# Altium PCB PDP_PCB.PcbDoc
Units mil, origin at the board's own origin, x right, y up, seen from the top; angles counter-clockwise.
Board outline 9130 x 8790 mil, 2 copper layers (Top Layer, Bottom Layer); 53 components, 56 nets, 343 pads, 0 vias.
Unrouted connection lines stored in the file: 164.
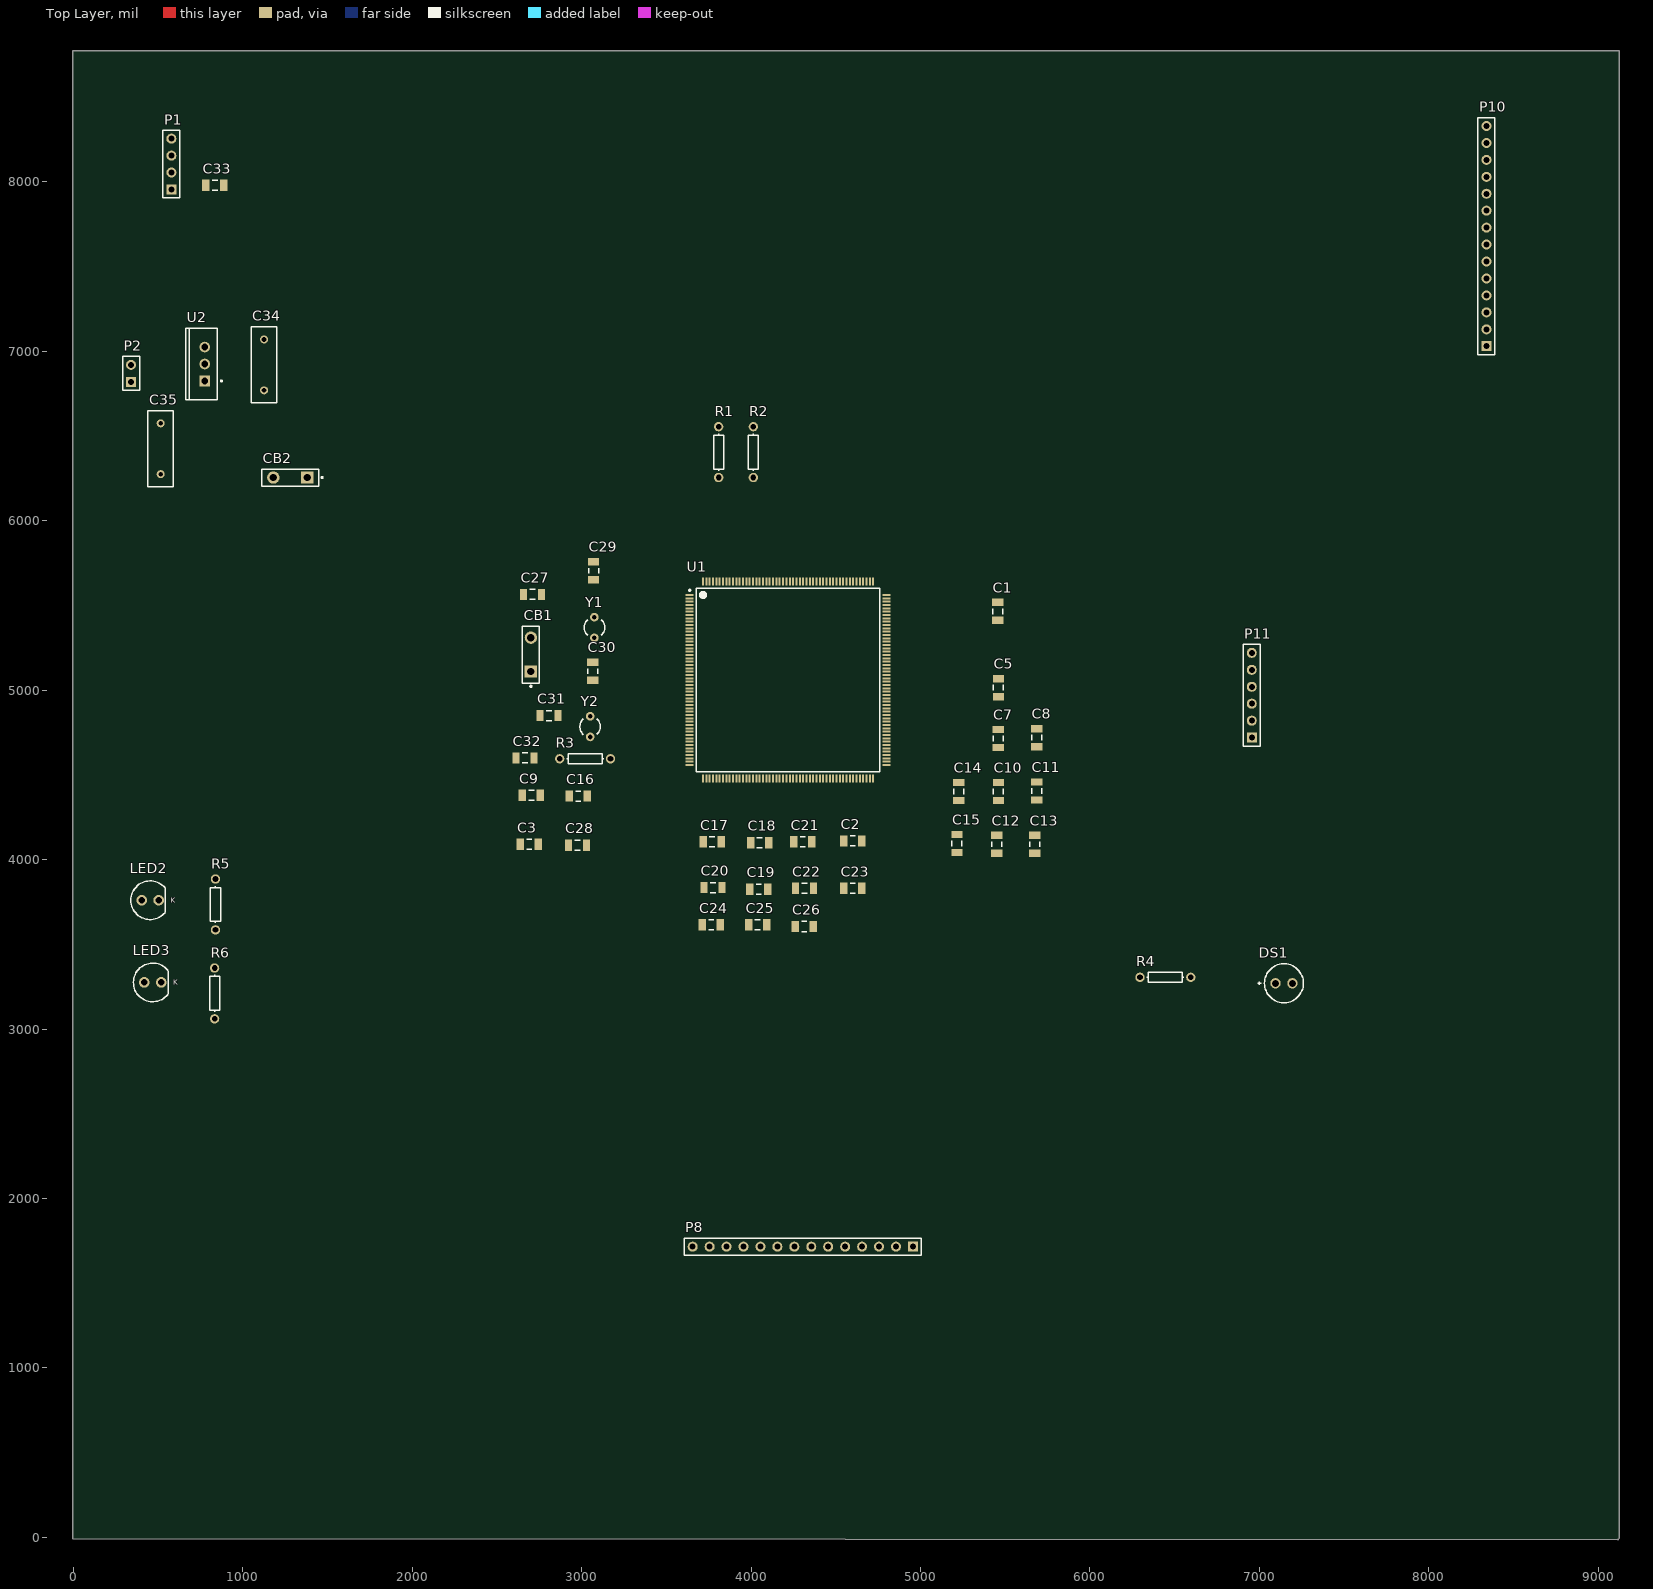
[diagram p0: Top Layer view]
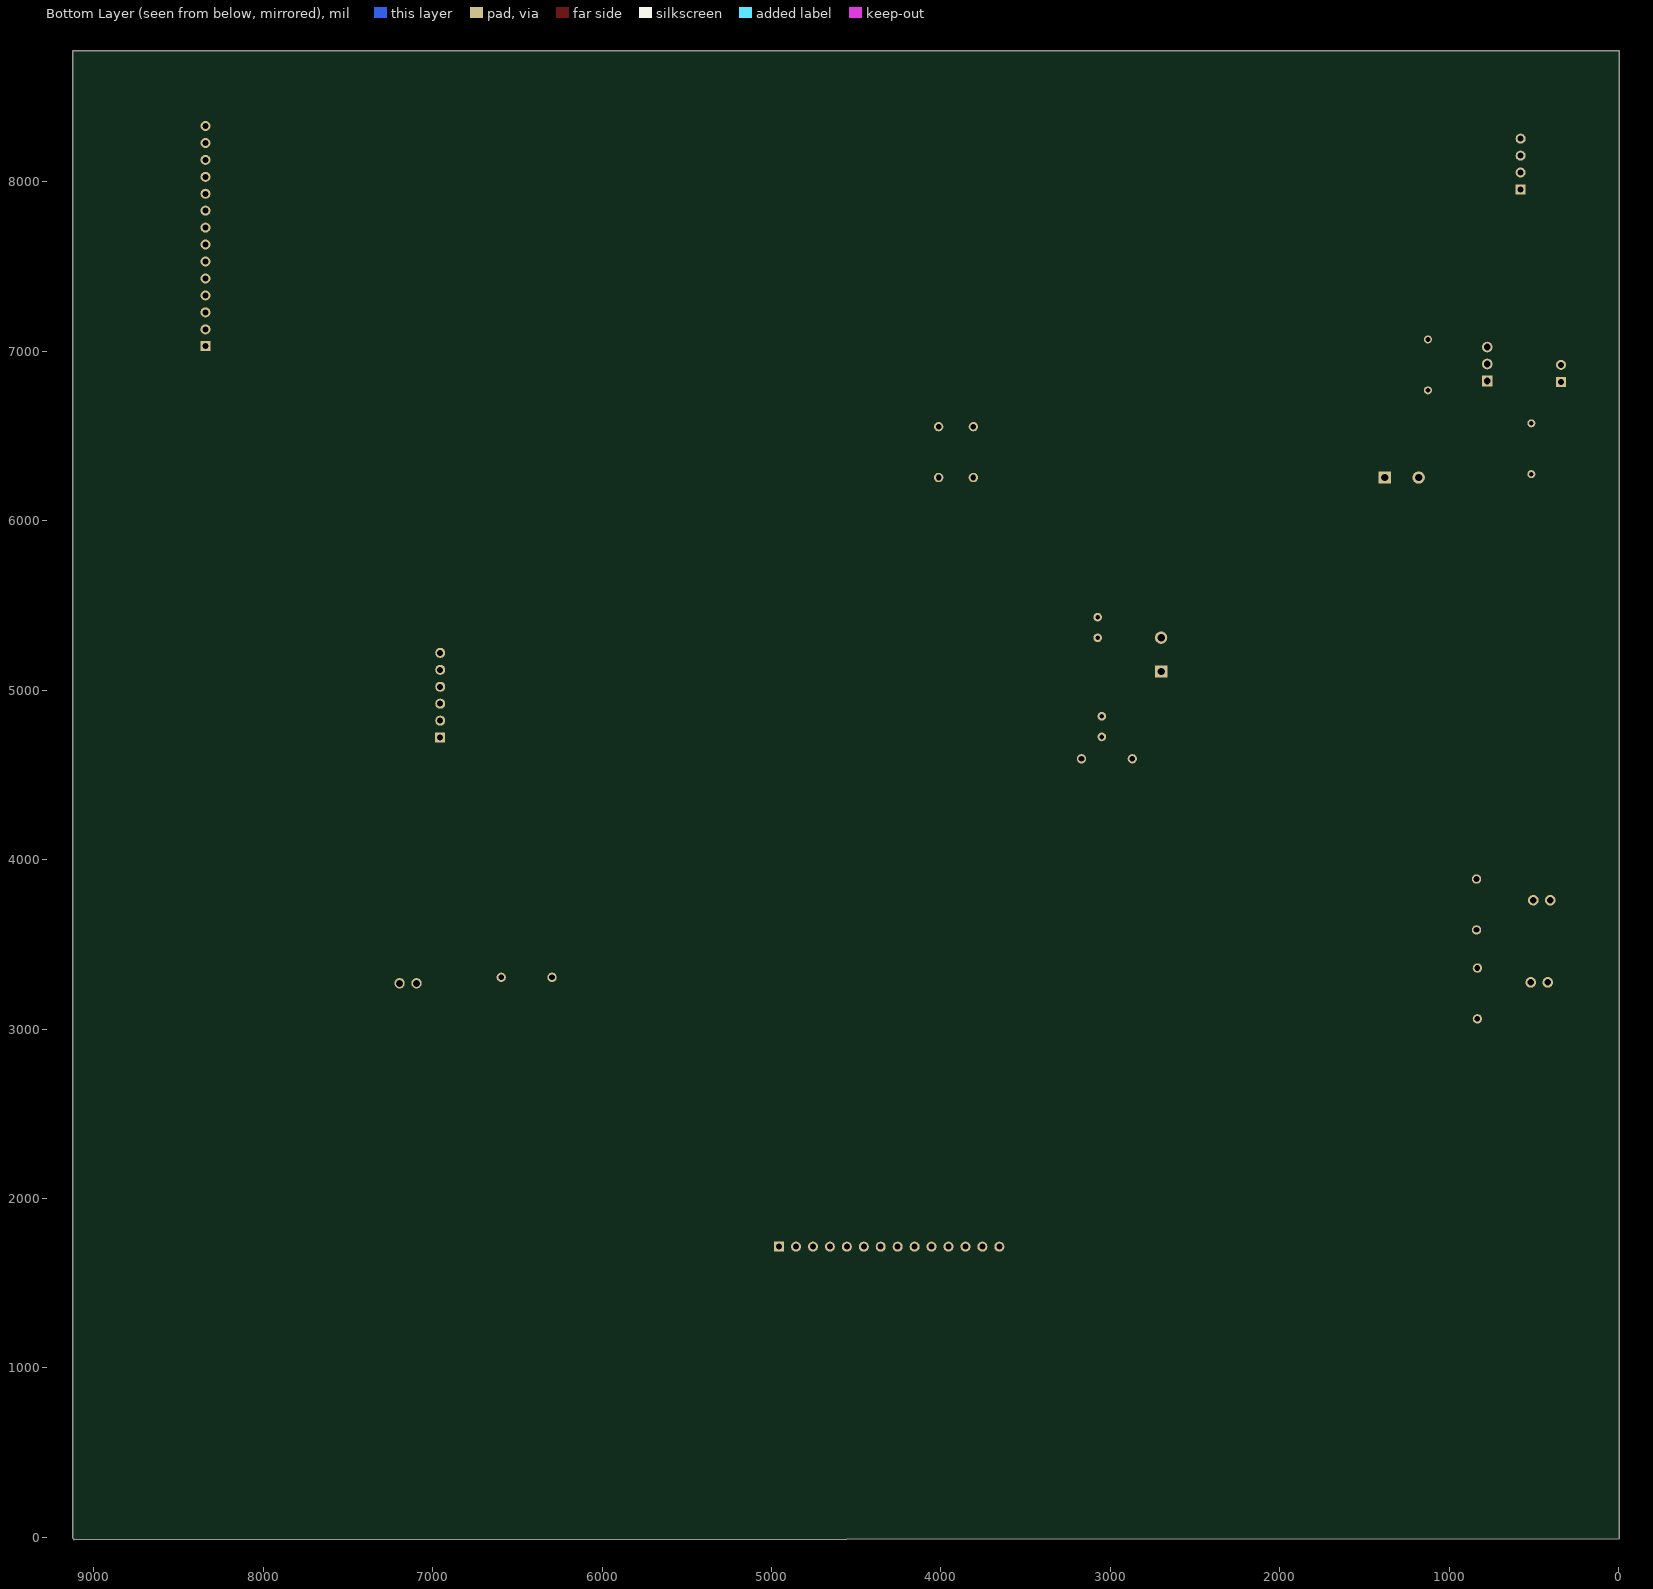
[diagram p1: Bottom Layer view, seen from below]

## Layer stack, top to bottom
Top Solder: solder mask 0.4, Solder Resist, Dk 3.5
Top Layer: signal copper 1.4
Dielectric 1: dielectric 12.6, FR-4, Dk 4.8
Bottom Layer: signal copper 1.4
Bottom Solder: solder mask 0.4, Solder Resist, Dk 3.5

## Board outline
-5,-10 -5,8775 9125,8775 9125,-5 9115,-15

## Design rules (kind name [scope] priority, off if disabled: settings)
Clearance [All] p1: gap=5 ignorepadtopadclearanceinfootprint=TRUE except(0: Arc-Hole Track-Hole SMDPad-Hole THPad-Hole Via-Hole Fill-Hole Poly-Hole Region-Hole Text-Hole)
PolygonConnect [All] p1: connectstyle=Relief reliefconductorwidth=10 reliefentries=4 polygonreliefangle="90 Angle" airgapwidth=10
RoutingVias [All] p1: holewidth=28 width=50 viastyle="Through Hole" minholewidth=28 minwidth=50 maxholewidth=28 maxwidth=50
SolderMaskExpansion [All] p1: expansion=4
Width [All] p1: maxlimit=10 minlimit=10 preferedwidth=10
30 further rules are at their usual default settings.

## Components (designator, comment, footprint, x,y, rotation, side; value= is the part's Value field where it differs from the comment)
C1 "VCAP2" C1206 5455,5465 r90 top value=2.2uF
C2 "VCAP1" C1206 4600,4110 r180 top value=2.2uF
C3 "NRST Cap" C1206 2690,4090 r0 top value=0.1uF
C5 "DSI_Filter2" C1206 5460,5015 r90 top value=2.2uF
C7 "DSI_Filter3" C1206 5458.15,4715 r90 top value=100nF
C8 "DSI_Filter3" C1206 5685,4720 r90 top value=100nF
C9 "DSI_Filter3" C1206 2703.15,4380 r180 top value=100nF
C10 "DSI_Filter3" C1206 5460,4401.85 r90 top value=100nF
C11 "DSI_Filter3" C1206 5685,4405 r90 top value=100nF
C12 "DSI_Filter3" C1206 5450,4090 r90 top value=100nF
C13 "DSI_Filter3" C1206 5675,4090 r90 top value=100nF
C14 "DSI_Filter3" C1206 5225,4401.85 r90 top value=100nF
C15 "DSI_Filter3" C1206 5215,4095 r90 top value=100nF
C16 "DSI_Filter3" C1206 2980,4375 r0 top value=100nF
C17 "DSI_Filter3" C1206 3770,4105 r0 top value=100nF
C18 "DSI_Filter3" C1206 4050,4100 r0 top value=100nF
C19 "DSI_Filter3" C1206 4045,3825 r0 top value=100nF
C20 "DSI_Filter3" C1206 3775,3835 r180 top value=100nF
C21 "DSI_Filter3" C1206 4305,4105 r0 top value=100nF
C22 "DSI_Filter3" C1206 4315,3830 r180 top value=100nF
C23 "DSI_Filter3" C1206 4600,3830 r180 top value=100nF
C24 "DSI_Filter3" C1206 3765,3615 r180 top value=100nF
C25 "DSI_Filter3" C1206 4038.15,3615 r180 top value=100nF
C26 "DSI_Filter3" C1206 4313.15,3605 r180 top value=100nF
C27 "DSI_Filter3" C1206 2710,5565 r180 top value=4.7uF
C28 "DSI_Filter3" C1206 2975,4085 r180 top value=1uF
C29 "DSI_Filter3" C1206 3070,5705 r90 top value=12.5pF
C30 "DSI_Filter3" C1206 3065,5111.85 r90 top value=12.5pF
C31 "DSI_Filter3" C1206 2806.85,4850 r0 top value=18pF
C32 "DSI_Filter3" C1206 2665,4600 r180 top value=18pF
C33 "DSI_Filter3" C1206 835,7980 r180 top value=100nF
C34 "Cap" RAD-0.3 1125,6920 r270 top value=0.47uF
C35 "Cap" RAD-0.3 515,6425 r90 top value=33uF
CB1 "Reset Button" SPST-2 2700,5210 r90 top
CB2 "REG_PWR" SPST-2 1280,6255 r180 top
DS1 "PWR_LED" AVAG-HLMP-4740 7145,3270 r0 top
LED2 "STATUS1" "Type 5mm" 453.15,3760 r0 top
LED3 "STATUS2" "Type 5mm" 468.15,3275 r0 top
P1 "Header 4" HDR1X4 578.15,7955 r90 top
P2 "Header 2" HDR1X2 340,6820 r90 top
P8 "Header 14" HDR1X14 4955,1715 r180 top
P10 "Header 14" HDR1X14 8340,7030 r90 top
P11 "Header 6" HDR1X6 6955,4720 r90 top
R1 "PDR_Pullup" AXIAL-0.3 3808.15,6405 r270 top value=10K
R2 "BOOT_Pulldown" AXIAL-0.3 4013.15,6405 r90 top value=10K
R3 "Inverter_Lim" AXIAL-0.3 3020,4595 r0 top value=100
R4 "Inverter_Lim" AXIAL-0.3 6445,3305 r0 top value=100
R5 "Inverter_Lim" AXIAL-0.3 838.15,3735 r90 top value=100
R6 "Inverter_Lim" AXIAL-0.3 833.15,3210 r90 top value=100
U1 "STM32F769BIT6" STM-LQFP208_V 4218.15,5060 r0 top
U2 "LM3940IT-3.3" NDE0003A 775,6925 r90 top
Y1 "XTAL 32.768 kHz" R38 3075,5370 r0 top
Y2 "XTAL 25 MHz" R38 3050,4785 r0 top

## Footprints (in the part's own frame and the unit in brackets; to place one, negate y for a bottom-side part, rotate by r counter-clockwise, add the part's x,y. Pads: shape width x height; smd on the part's side, far side on the other; paste and mask are expansions set on the pad)
AVAG-HLMP-4740 [mm] "THD, 2-Leads, Dia 5.845mm, Pitch 2.54mm"
  round 1.55 hole 1.05: 1(-1.27,0) 2(1.27,0)
  silkscreen extent -3.92,-2.92 2.92,2.92
AXIAL-0.3 [mm] "Axial Device, Thru-Hole; 2 Leads; 0.3 in Pin Spacing"
  round 1.4 hole 0.85: 1(-3.81,0) 2(3.81,0)
  silkscreen extent -2.77,-0.76 2.77,0.76
C1206 [mm] "Chip Capacitor, Body 3.2x1.6mm, IPC High Density"
  rect 1.1x1.7 smd: 1(-1.35,0) 2(1.35,0)
  silkscreen extent -0.4,-0.75 0.4,0.75, body extent -1.7,-0.9 1.7,0.9, height 1.3
HDR1X2 [mm] "Connector; Header; 2 Position"
  rect 1.5x1.5 hole 0.9: 1(0,0)
  round 1.5 hole 0.9: 2(2.54,0)
  silkscreen extent -1.27,-1.27 3.81,1.27
HDR1X4 [mm] "Connector; Header; 4 Position"
  rect 1.5x1.5 hole 0.9: 1(0,0)
  round 1.5 hole 0.9: 2(2.54,0) 3(5.08,0) 4(7.62,0)
  silkscreen extent -1.27,-1.27 8.89,1.27
HDR1X6 [mm] "Connector; Header; 6 Position"
  rect 1.5x1.5 hole 0.9: 1(0,0)
  round 1.5 hole 0.9: 2(2.54,0) 3(5.08,0) 4(7.62,0) 5(10.16,0) 6(12.7,0)
  silkscreen extent -1.27,-1.27 13.97,1.27
HDR1X14 [mm] "Connector; Header; 14 Position"
  rect 1.5x1.5 hole 0.9: 1(0,0)
  round 1.5 hole 0.9: 2(2.54,0) 3(5.08,0) 4(7.62,0) 5(10.16,0) 6(12.7,0) 7(15.24,0) 8(17.78,0) 9(20.32,0) 10(22.86,0) 11(25.4,0) 12(27.94,0) 13(30.48,0) 14(33.02,0)
  silkscreen extent -1.27,-1.27 34.29,1.27
NDE0003A [mm] "FM, 3-Leads, Body 10.7x4.7mm, Pitch 2.54mm"
  rect 1.6x1.6 hole 1: 1(-2.54,0)
  round 1.6 hole 1: 2(0,0) 3(2.54,0)
  silkscreen extent -5.35,-2.63 5.35,2.85, body extent -5.4,-1.9 5.4,2.9, height 19.4
R38 [mm] "Crystal, Thru-Hole; 2 Leads; Body 3.1 x 8.2 mm (Dia.xH)"
  round 1.3 hole 0.7: 1(0,1.55) 2(0,-1.55)
  silkscreen extent -1.55,-1.19 1.55,1.17
RAD-0.3 [mm] "Radial Cap, Thru-Hole; 2 Leads; 0.3 in Pin Spacing"
  round 1.2 hole 0.7: 1(-3.81,0) 2(3.81,0)
  silkscreen extent -5.71,-1.91 5.71,1.91
SPST-2 [mm] "Switch; 2 Leads"
  rect 1.85x1.85 hole 1.1: 1(-2.54,0)
  round 1.85 hole 1.1: 2(2.54,0)
  silkscreen extent -4.89,-1.27 4.28,1.27
STM-LQFP208_V [mm] "QFP, 208-Leads, Body 28x28mm, Pitch 0.5mm"
  rect 1.2x0.3 smd: 1(-14.75,12.75) 2(-14.75,12.25) 3(-14.75,11.75) 4(-14.75,11.25) 5(-14.75,10.75) 6(-14.75,10.25) 7(-14.75,9.75) 8(-14.75,9.25) 9(-14.75,8.75) 10(-14.75,8.25) 11(-14.75,7.75) 12(-14.75,7.25) 13(-14.75,6.75) 14(-14.75,6.25) 15(-14.75,5.75) 16(-14.75,5.25) 17(-14.75,4.75) 18(-14.75,4.25) 19(-14.75,3.75) 20(-14.75,3.25) 21(-14.75,2.75) 22(-14.75,2.25) 23(-14.75,1.75) 24(-14.75,1.25) 25(-14.75,0.75) 26(-14.75,0.25) 27(-14.75,-0.25) 28(-14.75,-0.75) 29(-14.75,-1.25) 30(-14.75,-1.75) 31(-14.75,-2.25) 32(-14.75,-2.75) 33(-14.75,-3.25) 34(-14.75,-3.75) 35(-14.75,-4.25) 36(-14.75,-4.75) 37(-14.75,-5.25) 38(-14.75,-5.75) 39(-14.75,-6.25) 40(-14.75,-6.75) 41(-14.75,-7.25) 42(-14.75,-7.75) 43(-14.75,-8.25) 44(-14.75,-8.75) 45(-14.75,-9.25) 46(-14.75,-9.75) 47(-14.75,-10.25) 48(-14.75,-10.75) 49(-14.75,-11.25) 50(-14.75,-11.75) 51(-14.75,-12.25) 52(-14.75,-12.75) 105(14.75,-12.75) 106(14.75,-12.25) 107(14.75,-11.75) 108(14.75,-11.25) 109(14.75,-10.75) 110(14.75,-10.25) 111(14.75,-9.75) 112(14.75,-9.25) 113(14.75,-8.75) 114(14.75,-8.25) 115(14.75,-7.75) 116(14.75,-7.25) 117(14.75,-6.75) 118(14.75,-6.25) 119(14.75,-5.75) 120(14.75,-5.25) 121(14.75,-4.75) 122(14.75,-4.25) 123(14.75,-3.75) 124(14.75,-3.25) 125(14.75,-2.75) 126(14.75,-2.25) 127(14.75,-1.75) 128(14.75,-1.25) 129(14.75,-0.75) 130(14.75,-0.25) 131(14.75,0.25) 132(14.75,0.75) 133(14.75,1.25) 134(14.75,1.75) 135(14.75,2.25) 136(14.75,2.75) 137(14.75,3.25) 138(14.75,3.75) 139(14.75,4.25) 140(14.75,4.75) 141(14.75,5.25) 142(14.75,5.75) 143(14.75,6.25) 144(14.75,6.75) 145(14.75,7.25) 146(14.75,7.75) 147(14.75,8.25) 148(14.75,8.75) 149(14.75,9.25) 150(14.75,9.75) 151(14.75,10.25) 152(14.75,10.75) 153(14.75,11.25) 154(14.75,11.75) 155(14.75,12.25) 156(14.75,12.75)
  rect 0.3x1.2 smd: 53(-12.75,-14.75) 54(-12.25,-14.75) 55(-11.75,-14.75) 56(-11.25,-14.75) 57(-10.75,-14.75) 58(-10.25,-14.75) 59(-9.75,-14.75) 60(-9.25,-14.75) 61(-8.75,-14.75) 62(-8.25,-14.75) 63(-7.75,-14.75) 64(-7.25,-14.75) 65(-6.75,-14.75) 66(-6.25,-14.75) 67(-5.75,-14.75) 68(-5.25,-14.75) 69(-4.75,-14.75) 70(-4.25,-14.75) 71(-3.75,-14.75) 72(-3.25,-14.75) 73(-2.75,-14.75) 74(-2.25,-14.75) 75(-1.75,-14.75) 76(-1.25,-14.75) 77(-0.75,-14.75) 78(-0.25,-14.75) 79(0.25,-14.75) 80(0.75,-14.75) 81(1.25,-14.75) 82(1.75,-14.75) 83(2.25,-14.75) 84(2.75,-14.75) 85(3.25,-14.75) 86(3.75,-14.75) 87(4.25,-14.75) 88(4.75,-14.75) 89(5.25,-14.75) 90(5.75,-14.75) 91(6.25,-14.75) 92(6.75,-14.75) 93(7.25,-14.75) 94(7.75,-14.75) 95(8.25,-14.75) 96(8.75,-14.75) 97(9.25,-14.75) 98(9.75,-14.75) 99(10.25,-14.75) 100(10.75,-14.75) 101(11.25,-14.75) 102(11.75,-14.75) 103(12.25,-14.75) 104(12.75,-14.75) 157(12.75,14.75) 158(12.25,14.75) 159(11.75,14.75) 160(11.25,14.75) 161(10.75,14.75) 162(10.25,14.75) 163(9.75,14.75) 164(9.25,14.75) 165(8.75,14.75) 166(8.25,14.75) 167(7.75,14.75) 168(7.25,14.75) 169(6.75,14.75) 170(6.25,14.75) 171(5.75,14.75) 172(5.25,14.75) 173(4.75,14.75) 174(4.25,14.75) 175(3.75,14.75) 176(3.25,14.75) 177(2.75,14.75) 178(2.25,14.75) 179(1.75,14.75) 180(1.25,14.75) 181(0.75,14.75) 182(0.25,14.75) 183(-0.25,14.75) 184(-0.75,14.75) 185(-1.25,14.75) 186(-1.75,14.75) 187(-2.25,14.75) 188(-2.75,14.75) 189(-3.25,14.75) 190(-3.75,14.75) 191(-4.25,14.75) 192(-4.75,14.75) 193(-5.25,14.75) 194(-5.75,14.75) 195(-6.25,14.75) 196(-6.75,14.75) 197(-7.25,14.75) 198(-7.75,14.75) 199(-8.25,14.75) 200(-8.75,14.75) 201(-9.25,14.75) 202(-9.75,14.75) 203(-10.25,14.75) 204(-10.75,14.75) 205(-11.25,14.75) 206(-11.75,14.75) 207(-12.25,14.75) 208(-12.75,14.75)
  silkscreen extent -14.87,-13.75 13.75,13.75, body extent -15,-15 15,15, height 1.6
"Type 5mm" [mm] "THT, LED-5mm, 2pin- Body 5.8mm"
  round 1.6 hole 1: 1(1.27,0) 2(-1.27,0)
  silkscreen extent -2.9,-2.9 2.29,2.9, body extent -2.9,-2.9 2.5,2.9, height 11.7

## Part data
C1 C2 C3 C5 C7 C8 C9 C10 C11 C12 C13 C14 C15 C16 C17 C18 C19 C20 C21 C22 C23 C24 C25 C26 C27 C28 C29 C30 C31 C32 C33: library part "Cap Semi", "Capacitor (Semiconductor SIM Model)", LatestRevisionDate=29-May-2009, LatestRevisionNote="IPC-7351 Footprint Added.", PackageDescription="Chip Capacitor", PackageReference=C1206, Published=8-Jun-2000, Publisher="Altium Limited"
C34 C35: "Capacitor", LatestRevisionDate=17-Jul-2002, LatestRevisionNote="Re-released for DXP Platform.", PackageDescription="Radial Cap, Thru-Hole; 2 Leads; 0.3 in Pin Spacing", PackageReference=RAD-0.3, Published=8-Jun-2000, Publisher="Altium Limited"
CB1 CB2: library part "Circuit Breaker", "Circuit Breaker", LatestRevisionDate=17-Jul-2002, LatestRevisionNote="Re-released for DXP Platform.", PackageDescription="Switch; 2 Leads", PackageReference=SPST-2, Published=24-Mar-1999, Publisher="Altium Limited"
DS1: library part CMP-2000-06413-1, "T-1 3/4 (5 mm) Low Current LED Lamp, Green, 1.9 V, -20 to 100 degC, 2-Pin THD, RoHS, Bulk", Color=Green, Dominant Wavelength/Color Temperature=569nm, Manufacturer=AvagoTechnologies, Package=2T-13/4, Package Description="2-Pin Through Hole Device, Dia 5.845 mm, Pitch 2.54 mm", Package Reference=HLMP-4740, Category=LEDs, Datasheet URL=http://docs.avagotech.com/docs/AV02-1557EN, Datasheet Version=07/2014, Intensity=2.3mcd, Lens Appearance=ColoredDiffused, Lens Shape Type=Circular, Manufacturer URL=http://www.avagotech.com/, Mounting=ThroughHole, Mounting Orientation=TopMount, Mounting Technology=ThroughHole, Number of LEDs=1, Packaging=Bulk, Peak Wavelength=565nm, Pin Count=2, Rad Hard=No, Type=Uni-Color, Viewing Angle=50°
LED2 LED3: library part CMP-1489-00006-1, "THT LED round mono-color waterclear, WL-TMRW ,Blue", Emitting color=Blue, Manufacturer="Wuerth Elektronik", PartNumber=151053BS04500, ComponentLink1Description="Manufacturer URL", ComponentLink1URL=http://www.we-online.com, ComponentLink2Description=Datasheet, ComponentLink2URL=http://katalog.we-online.de/pbs/datasheet/7448042001.pdfhttp://katalog.we-online.de/pbs/datasheet/7448042001.pdfhttp://katalog.we-online.de/pbs/datasheet/7448042001.pdfhttp://katalog.we-online.de/pbs/datasheet/151053BS04500.pdf, PackageReference="Type 5mm"
P1: "Header, 4-Pin", LatestRevisionDate=17-Jul-2002, LatestRevisionNote="Re-released for DXP Platform.", Publisher="Altium Limited"
P2: "Header, 2-Pin", LatestRevisionDate=17-Jul-2002, LatestRevisionNote="Re-released for DXP Platform.", Publisher="Altium Limited"
P8 P10: "Header, 14-Pin", LatestRevisionDate=17-Jul-2002, LatestRevisionNote="Re-released for DXP Platform.", Publisher="Altium Limited"
P11: "Header, 6-Pin", LatestRevisionDate=17-Jul-2002, LatestRevisionNote="Re-released for DXP Platform.", Publisher="Altium Limited"
R1 R2 R3 R4 R5 R6: library part Res1, "Resistor", LatestRevisionDate=17-Jul-2002, LatestRevisionNote="Re-released for DXP Platform.", PackageDescription="Axial Device, Thru-Hole; 2 Leads; 0.3 in Pin Spacing", PackageReference=AXIAL-0.3, Published=8-Jun-2000, Publisher="Altium Limited"
U1: library part CMP-2000-07163-1, "ARM-Based Cortex-M7 32 Bit MCU+FPU, 462 DMIPS, 2048 kB Flash, 512 kB SRAM, 168 I/Os, -40 to 85 degC, 208-Pin LQFP, RoHS, Tray", Manufacturer=STMicroelectronics, MCU Case Style=LQFP, Package Description="208-Pin Low Profile Quad Flat Package, 28 x 28 mm Body, 0.5 mm Pitch", Package Reference=LQFP-208, Supply Voltage Max=3.6V, Supply Voltage Min=1.7V, Architecture=ARMCortex-M7, Automotive Qualification Standard=-, CPU Speed=216MHz, Datasheet URL=http://www.st.com/resource/en/datasheet/stm32f769bi.pdf, Datasheet Version="Rev. 3, 05/2016", Embedded Interface Type=CAN,Ethernet,I2C,I2S,SPI,UART,USART,USB, Manufacturer URL=http://www.st.com/, Mounting Technology=SurfaceMount, MSL=MSL3-168hours, No. of I/O's=168I/O's, No. of Pins=208Pins, Packaging=Each, Product Range=STM32F7ARMCortex-M7Microcontrollers, Program Memory Size=2MB, RAM Memory Size=512KB, SVHC=NoSVHC(17-Dec-2015)
U2: library part CMP-0062-02465-3, "1A Low Dropout Regulator for 5V to 3.3V Conversion, 3-pin TO-220", Manufacturer="Texas Instruments", PackageTopMarking="NSUZXYTTE#*LM3940IT*-3.3 P+", PowerWise=N, ComponentLink1Description="Datasheet URL", ComponentLink1URL=http://www.ti.com/general/docs/lit/getliterature.tsp?genericPartNumber=LM3940&fileType=pdf, CompType="LDO IC", PackageDescription="TO-220, Molded, 3 Lead, Straight", PackageReference=NDE0003A, PinCount=3, RoHS=N
Y1 Y2: library part XTAL, "Crystal Oscillator", LatestRevisionDate=17-Jul-2002, LatestRevisionNote="Re-released for DXP Platform.", PackageDescription="Crystal, Thru-Hole; 2 Leads; Body 3.1 x 8.2 mm (Dia.xH)", PackageReference=R38, Published=8-Jun-2000, Publisher="Altium Limited"

## Nets (pads, with @x,y where several pads share a name; then routed paths per layer and width w, separated by ;. In a path a pad name is that pad's centre, name@x,y a point inside that pad or via, vN(x,y) a via of type N, cw(c..) or ccw(c..) an arc to the next point about the centre after c; other vN are vias at no path point)
GND: C1.2 C2.2 C3.1 C5.1 C7.1 C8.1 C9.1 C10.1 C11.1 C12.1 C13.1 C14.1 C15.1 C16.1 C17.1 C18.1 C19.1 C20.1 C21.1 C22.1 C23.1 C24.1 C25.1 C26.1 C27.1 C28.1 C29.2 C30.2 C31.1 C32.1 C33.1 C34.1 C35.1 CB1.2 DS1.2 P1.2 P2.2 R2.1 R5.2 R6.2 U1.14 U1.25 U1.40 U1.51 U1.60 U1.72 U1.82 U1.93 U1.114 U1.122 U1.128 U1.136 U1.149 U1.170 U1.184 U1.202 U2.2
NetC1_1: C1.1 U1.148
NetC2_1: C2.1 U1.92
NetC3_2: C3.2 CB1.1 U1.34
NetC29_1: C29.1 U1.9 Y1.1
NetC30_1: C30.1 U1.10 Y1.2
NetC31_2: C31.2 U1.32 Y2.1
NetC32_2: C32.2 R3.1 Y2.2
NetC35_2: C35.2 CB2.1 U2.3
NetDS1_1: DS1.1 R4.2
NetLED2_1: LED2.1 R5.1
NetLED2_2: LED2.2 U1.177
NetLED3_1: LED3.1 R6.1
NetLED3_2: LED3.2 U1.190
NetP8_1: P8.1 U1.8
NetP8_2: P8.2 U1.163
NetP8_3: P8.3 U1.162
NetP8_4: P8.4 U1.161
NetP8_5: P8.5 U1.141
NetP8_6: P8.6 U1.140
NetP8_7: P8.7 U1.139
NetP8_8: P8.8 U1.138
NetP8_9: P8.9 U1.58
NetP8_10: P8.10 U1.57
NetP8_11: P8.11 U1.38
NetP8_12: P8.12 U1.37
NetP8_13: P8.13 U1.36
NetP8_14: P8.14 U1.35
NetP10_1: P10.1 U1.160
NetP10_2: P10.2 U1.146
NetP10_3: P10.3 U1.145
NetP10_4: P10.4 U1.144
NetP10_5: P10.5 U1.143
NetP10_6: P10.6 U1.142
NetP10_7: P10.7 U1.56
NetP10_8: P10.8 U1.55
NetP10_9: P10.9 U1.54
NetP10_10: P10.10 U1.53
NetP10_11: P10.11 U1.50
NetP10_12: P10.12 U1.45
NetP10_13: P10.13 U1.44
NetP10_14: P10.14 U1.43
NetP11_1: P11.1 U1.124
NetP11_2: P11.2 U1.123
NetP11_3: P11.3 U1.127
NetP11_4: P11.4 U1.126
NetP11_5: P11.5 U1.121
NetP11_6: P11.6 U1.120
NetR1_1: R1.1 U1.203
NetR2_2: R2.2 U1.197
NetR3_2: R3.2 U1.33
SWCLK: P1.3 U1.159
SWDIO: P1.4 U1.147
VDD: C7.2 C8.2 C9.2 C10.2 C11.2 C12.2 C13.2 C14.2 C15.2 C16.2 C17.2 C18.2 C19.2 C20.2 C21.2 C22.2 C23.2 C24.2 C25.2 C26.2 C27.2 C28.2 C33.2 CB2.2 P1.1 R1.2 R4.1 U1.6 U1.15 U1.26 U1.39 U1.41 U1.42 U1.52 U1.59 U1.73 U1.83 U1.94 U1.103 U1.115 U1.118 U1.137 U1.150 U1.158 U1.171 U1.185 U1.204
VDD_12_DSI: C5.2 U1.119 U1.125
VOLT_IN: C34.2 P2.1 U2.1
pads on no net: U1.1 U1.2 U1.3 U1.4 U1.5 U1.7 U1.11 U1.12 U1.13 U1.16 U1.17 U1.18 U1.19 U1.20 U1.21 U1.22 U1.23 U1.24 U1.27 U1.28 U1.29 U1.30 U1.31 U1.46 U1.47 U1.48 U1.49 U1.61 U1.62 U1.63 U1.64 U1.65 U1.66 U1.67 U1.68 U1.69 U1.70 U1.71 U1.74 U1.75 U1.76 U1.77 U1.78 U1.79 U1.80 U1.81 U1.84 U1.85 U1.86 U1.87 U1.88 U1.89 U1.90 U1.91 U1.95 U1.96 U1.97 U1.98 U1.99 U1.100 U1.101 U1.102 U1.104 U1.105 U1.106 U1.107 U1.108 U1.109 U1.110 U1.111 U1.112 U1.113 U1.116 U1.117 U1.129 U1.130 U1.131 U1.132 U1.133 U1.134 U1.135 U1.151 U1.152 U1.153 U1.154 U1.155 U1.156 U1.157 U1.164 U1.165 U1.166 U1.167 U1.168 U1.169 U1.172 U1.173 U1.174 U1.175 U1.176 U1.178 U1.179 U1.180 U1.181 U1.182 U1.183 U1.186 U1.187 U1.188 U1.189 U1.191 U1.192 U1.193 U1.194 U1.195 U1.196 U1.198 U1.199 U1.200 U1.201 U1.205 U1.206 U1.207 U1.208

## Text inside footprints (layer, text, board x,y; h text height)
LED2: Top Overlay "K" at 573.15,3745 h30; Mechanical 15 "K" at 573.15,3745 h30
LED3: Top Overlay "K" at 588.15,3260 h30; Mechanical 15 "K" at 588.15,3260 h30